# EAGLE board RGB_Taster_WS2811 4 mal (EAGLE 9.6.2)
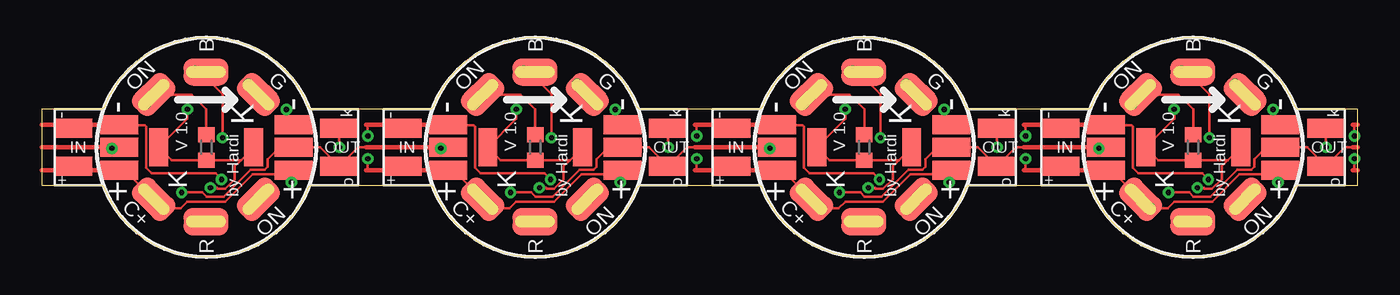
[diagram p0: board, top side]
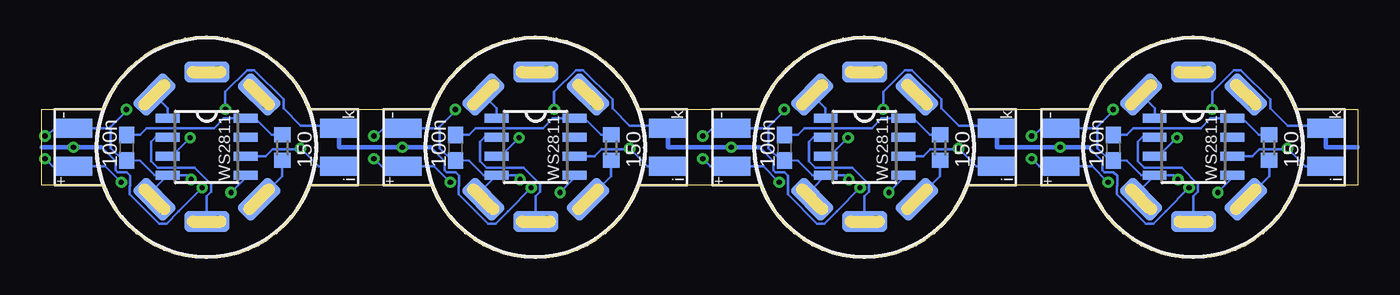
[diagram p1: board, bottom side, seen from below]

Size 88 x 14.7 mm. Coordinates in mm from the lower left corner, seen from the top.
Outline: 17.98,4.81 18.11,4.81
Outline: 18.11,4.81 22,4.81 25.89,4.81 arc-70 26.23,4.56 arc70 32.98,0 arc70 39.77,4.56 arc-70 40.11,4.81
Outline: 18.11,4.81 arc70 17.77,4.56 arc-70 10.98,0 arc-70 4.23,4.56 arc70 3.89,4.81 0,4.81 0,9.89 3.89,9.89 arc75 4.23,10.14 arc-70 10.98,14.7 arc-70 17.77,10.14 arc70 18.11,9.89 22,9.89 25.89,9.89 arc75 26.23,10.14 arc-70 32.98,14.7 arc-70 39.77,10.14 arc70 40.11,9.89 44,9.89 47.89,9.89 arc75 48.23,10.14 arc-70 54.98,14.7 arc-70 61.77,10.14 arc70 62.11,9.89 66,9.89 69.89,9.89 arc75 70.23,10.14 arc-70 76.98,14.7 arc-70 83.77,10.14 arc70 84.11,9.89 88,9.89 88,4.81 84.11,4.81
Outline: 39.98,4.81 40.11,4.81
Outline: 40.11,4.81 44,4.81 47.89,4.81 arc-70 48.23,4.56 arc70 54.98,0 arc70 61.77,4.56 arc-70 62.11,4.81
Outline: 61.98,4.81 62.11,4.81
Outline: 62.11,4.81 66,4.81 69.89,4.81 arc-70 70.23,4.56 arc70 76.98,0 arc70 83.77,4.56 arc-70 84.11,4.81
Outline: 83.98,4.81 84.11,4.81
Copper layers (1*16): Top 0.035mm / dielectric 1.5mm / Bottom 0.035mm
Design rules "default *": minimum track width 6mil, minimum drill 0.35mm, track to track 6mil, track to pad 6mil, pad to pad 6mil, via to via 6mil, smd to smd 6mil, copper to edge 40mil, drill to drill 6mil, minimum pad ring 10mil, minimum via ring 8mil, stop-mask expansion 4mil, vias tented up to drill 0.5mm, thermal gap 10mil

## Footprints (pad centres in the part's own frame; a part is rotated, then mirrored left to right if it is on the bottom)
LANG_LOCH2 = smd 3 x 1.8: P$1 0,0 | smd 3 x 1.4 bottom: P$2 0,0
C0603 = smd 1.1 x 1: 1 -0.85,0; 2 0.85,0
SMD1,27-2,54 = smd 1.27 x 2.54: 1 0,0
RCL_R0603 = smd 1 x 1.1: 1 -0.85,0; 2 0.85,0
SOP8 = smd 0.6 x 1.6: 1 -1.905,-2.6; 2 -0.635,-2.6; 3 0.635,-2.6; 4 1.905,-2.6; 5 1.905,2.6; 6 0.635,2.6; 7 -0.635,2.6; 8 -1.905,2.6

## Placement (x,y rotation side)
B  LANG_LOCH2  [LANG_LOCH2]  10.98,12.37 180 top
B1  LANG_LOCH2  [LANG_LOCH2]  32.98,12.37 180 top
B2  LANG_LOCH2  [LANG_LOCH2]  54.98,12.37 180 top
B3  LANG_LOCH2  [LANG_LOCH2]  76.98,12.37 180 top
C1  100n  [C0603]  16.33,7.33 270 bottom
C2  100n  [C0603]  38.33,7.33 270 bottom
C3  100n  [C0603]  60.33,7.33 270 bottom
C4  100n  [C0603]  82.33,7.33 270 bottom
C+  LANG_LOCH2  [LANG_LOCH2]  7.48,3.87 135 top
C+1  LANG_LOCH2  [LANG_LOCH2]  29.48,3.87 135 top
C+2  LANG_LOCH2  [LANG_LOCH2]  51.48,3.87 135 top
C+3  LANG_LOCH2  [LANG_LOCH2]  73.48,3.87 135 top
G  LANG_LOCH2  [LANG_LOCH2]  14.48,10.87 135 top
G1  LANG_LOCH2  [LANG_LOCH2]  36.48,10.87 135 top
G2  LANG_LOCH2  [LANG_LOCH2]  58.48,10.87 135 top
G3  LANG_LOCH2  [LANG_LOCH2]  80.48,10.87 135 top
ON1  LANG_LOCH2  [LANG_LOCH2]  7.48,10.87 45 top
ON2  LANG_LOCH2  [LANG_LOCH2]  14.48,3.87 45 top
ON3  LANG_LOCH2  [LANG_LOCH2]  29.48,10.87 45 top
ON4  LANG_LOCH2  [LANG_LOCH2]  36.48,3.87 45 top
ON5  LANG_LOCH2  [LANG_LOCH2]  51.48,10.87 45 top
ON6  LANG_LOCH2  [LANG_LOCH2]  58.48,3.87 45 top
ON7  LANG_LOCH2  [LANG_LOCH2]  73.48,10.87 45 top
ON8  LANG_LOCH2  [LANG_LOCH2]  80.48,3.87 45 top
PI1  [SMD1,27-2,54]  5.16,5.83 90 top
PI2  [SMD1,27-2,54]  5.16,7.35 90 top
PI3  [SMD1,27-2,54]  5.16,8.87 90 top
PI4  [SMD1,27-2,54]  14.18,7.35 180 top
PI5  [SMD1,27-2,54]  27.16,7.35 90 top
PI6  [SMD1,27-2,54]  27.16,5.83 90 top
PI7  [SMD1,27-2,54]  27.16,8.87 90 top
PI8  [SMD1,27-2,54]  36.17,7.35 180 top
PI9  [SMD1,27-2,54]  49.16,7.35 90 top
PI10  [SMD1,27-2,54]  49.16,5.83 90 top
PI11  [SMD1,27-2,54]  49.16,8.87 90 top
PI12  [SMD1,27-2,54]  58.17,7.35 180 top
PI13  [SMD1,27-2,54]  71.16,7.35 90 top
PI14  [SMD1,27-2,54]  71.16,5.83 90 top
PI15  [SMD1,27-2,54]  71.16,8.87 90 top
PI16  [SMD1,27-2,54]  80.17,7.35 180 top
PO1  [SMD1,27-2,54]  16.84,5.83 90 top
PO2  [SMD1,27-2,54]  16.84,7.35 90 top
PO3  [SMD1,27-2,54]  16.84,8.87 90 top
PO4  [SMD1,27-2,54]  7.83,7.35 180 top
PO5  [SMD1,27-2,54]  38.84,7.35 90 top
PO6  [SMD1,27-2,54]  38.84,5.83 90 top
PO7  [SMD1,27-2,54]  38.84,8.87 90 top
PO8  [SMD1,27-2,54]  29.82,7.35 180 top
PO9  [SMD1,27-2,54]  60.84,7.35 90 top
PO10  [SMD1,27-2,54]  60.84,5.83 90 top
PO11  [SMD1,27-2,54]  60.84,8.87 90 top
PO12  [SMD1,27-2,54]  51.82,7.35 180 top
PO13  [SMD1,27-2,54]  82.84,7.35 90 top
PO14  [SMD1,27-2,54]  82.84,5.83 90 top
PO15  [SMD1,27-2,54]  82.84,8.87 90 top
PO16  [SMD1,27-2,54]  73.83,7.35 180 top
R  LANG_LOCH2  [LANG_LOCH2]  10.98,2.37 180 top
R1  150  [RCL_R0603]  5.92,7.33 90 bottom
R2  ?  [RCL_R0603]  11,7.35 90 top
R3  LANG_LOCH2  [LANG_LOCH2]  32.98,2.37 180 top
R4  150  [RCL_R0603]  27.92,7.33 90 bottom
R5  ?  [RCL_R0603]  33,7.35 90 top
R6  LANG_LOCH2  [LANG_LOCH2]  54.98,2.37 180 top
R7  150  [RCL_R0603]  49.92,7.33 90 bottom
R8  ?  [RCL_R0603]  55,7.35 90 top
R9  LANG_LOCH2  [LANG_LOCH2]  76.98,2.37 180 top
R10  150  [RCL_R0603]  71.92,7.33 90 bottom
R11  ?  [RCL_R0603]  77,7.35 90 top
SI1  [SMD1,27-2,54]  2.11,6.08 90 top
SI2  [SMD1,27-2,54]  2.11,6.08 270 bottom
SI3  [SMD1,27-2,54]  2.11,8.62 90 top
SI4  [SMD1,27-2,54]  2.11,8.62 270 bottom
SI5  [SMD1,27-2,54]  24.11,6.08 90 top
SI6  [SMD1,27-2,54]  24.11,6.08 270 bottom
SI7  [SMD1,27-2,54]  24.11,8.62 90 top
SI8  [SMD1,27-2,54]  24.11,8.62 270 bottom
SI9  [SMD1,27-2,54]  46.11,6.08 90 top
SI10  [SMD1,27-2,54]  46.11,6.08 270 bottom
SI11  [SMD1,27-2,54]  46.11,8.62 90 top
SI12  [SMD1,27-2,54]  46.11,8.62 270 bottom
SI13  [SMD1,27-2,54]  68.11,6.08 90 top
SI14  [SMD1,27-2,54]  68.11,6.08 270 bottom
SI15  [SMD1,27-2,54]  68.11,8.62 90 top
SI16  [SMD1,27-2,54]  68.11,8.62 270 bottom
SO1  [SMD1,27-2,54]  19.89,6.08 270 bottom
SO2  [SMD1,27-2,54]  19.89,6.08 90 top
SO3  [SMD1,27-2,54]  19.89,8.62 270 bottom
SO4  [SMD1,27-2,54]  19.89,8.62 90 top
SO5  [SMD1,27-2,54]  41.89,6.08 90 top
SO6  [SMD1,27-2,54]  41.89,6.08 270 bottom
SO7  [SMD1,27-2,54]  41.89,8.62 270 bottom
SO8  [SMD1,27-2,54]  41.89,8.62 90 top
SO9  [SMD1,27-2,54]  63.89,6.08 90 top
SO10  [SMD1,27-2,54]  63.89,6.08 270 bottom
SO11  [SMD1,27-2,54]  63.89,8.62 270 bottom
SO12  [SMD1,27-2,54]  63.89,8.62 90 top
SO13  [SMD1,27-2,54]  85.89,6.08 90 top
SO14  [SMD1,27-2,54]  85.89,6.08 270 bottom
SO15  [SMD1,27-2,54]  85.89,8.62 270 bottom
SO16  [SMD1,27-2,54]  85.89,8.62 90 top
U1  WS2811  [SOP8]  32.98,7.37 270 bottom
U2  WS2811  [SOP8]  54.98,7.37 270 bottom
U3  WS2811  [SOP8]  10.98,7.37 270 bottom
U4  WS2811  [SOP8]  76.98,7.37 270 bottom

## Library data of the parts
B B1-B3 C+ C+1-C+3 G G1-G3 ON1-ON8 R R3 R6 R9 = RGB_Tast
C1-C4 = rcl; SPICEPREFIX: C
PI1-PI16 PO1-PO16 SI1-SI16 SO1-SO16 = wirepad
R1 R2 R4 R5 R7 R8 R10 R11 = Sound_MP3-TF-16P_and_WS2811; SPICEPREFIX: R
U1-U4 = S3PO_Modul_WS2811

## Nets
+5V: C+1.P$1 C+1.P$2 C+2.P$1 C+2.P$2 C+3.P$1 C+3.P$2 C+.P$1 C+.P$2 PI1.1 PI6.1 PI10.1 PI14.1 PO1.1 PO6.1 PO10.1 PO14.1 R1.1 R4.1 R7.1 R10.1 SI1.1 SI5.1 SI9.1 SI13.1 SO1.1 SO6.1 SO10.1 SO14.1
BUT: PI4.1 PI8.1 PI12.1 PI16.1 PO4.1 PO8.1 PO12.1 PO16.1 R2.1 R5.1 R8.1 R11.1 SI4.1 SI8.1 SI12.1 SI16.1 SO4.1 SO8.1 SO12.1 SO16.1
DIN: PI2.1 SI2.1 U3.6
DIN1: PI5.1 PO2.1 SI6.1 SO2.1 U1.6 U3.5
DIN2: PI9.1 PO5.1 SI10.1 SO5.1 U1.5 U2.6
DIN3: PI13.1 PO9.1 SI14.1 SO9.1 U2.5 U4.6
DOUT3: PO13.1 SO13.1 U4.5
GND: C1.2 C2.2 C3.2 C4.2 ON2.P$1 ON2.P$2 ON4.P$1 ON4.P$2 ON6.P$1 ON6.P$2 ON8.P$1 ON8.P$2 PI3.1 PI7.1 PI11.1 PI15.1 PO3.1 PO7.1 PO11.1 PO15.1 SI3.1 SI7.1 SI11.1 SI15.1 SO3.1 SO7.1 SO11.1 SO15.1 U1.4 U2.4 U3.4 U4.4
N$1: C2.1 R4.2 U1.8
N$2: B.P$1 B.P$2 U3.3
N$3: R.P$1 R.P$2 U3.2
N$4: C1.1 R1.2 U3.8
N$5: G.P$1 G.P$2 U3.1
N$6: ON1.P$1 ON1.P$2 R2.2
N$7: B1.P$1 B1.P$2 U1.3
N$8: R3.P$1 R3.P$2 U1.2
N$9: G1.P$1 G1.P$2 U1.1
N$10: ON3.P$1 ON3.P$2 R5.2
N$11: C3.1 R7.2 U2.8
N$12: B2.P$1 B2.P$2 U2.3
N$13: R6.P$1 R6.P$2 U2.2
N$14: G2.P$1 G2.P$2 U2.1
N$15: ON5.P$1 ON5.P$2 R8.2
N$16: C4.1 R10.2 U4.8
N$17: B3.P$1 B3.P$2 U4.3
N$18: R9.P$1 R9.P$2 U4.2
N$19: G3.P$1 G3.P$2 U4.1
N$20: ON7.P$1 ON7.P$2 R11.2

## Tracks (layer width: path | path; a pad name or v marks a point on that pad's centre or on a via)
+5V  (via drill 0.35)
  Top 0.152: C+.P$2 v8.06,3.29 v8.08,3.29 9.29,3.29 9.73,3.72 12.27,3.72 14.09,5.55 16.56,5.55 PO1.1 16.36,5.34 v16.69,5.02 | C+.P$2 5.52,5.83 PI1.1 | 7.78,3.57 C+.P$2 | 2.11,5.9 SI1.1 2.84,5.83 | 21.79,5.83 v21.79,6.59 | C+1.P$2 v30.06,3.29 v30.08,3.29 31.29,3.29 31.73,3.72 34.27,3.72 36.09,5.55 38.56,5.55 PO6.1 38.36,5.34 v38.69,5.02 | C+1.P$2 27.52,5.83 PI6.1 | 29.78,3.57 C+1.P$2 | 24.11,5.9 SI5.1 24.84,5.83 | 43.8,5.83 v43.8,6.59 | C+2.P$2 v52.06,3.29 v52.08,3.29 53.29,3.29 53.73,3.72 56.27,3.72 58.09,5.55 60.56,5.55 PO10.1 60.36,5.34 v60.69,5.02 | C+2.P$2 49.52,5.83 PI10.1 | 51.78,3.57 C+2.P$2 | 46.11,5.9 SI9.1 46.84,5.83 | 65.8,5.83 v65.8,6.59 | C+3.P$2 74.06,3.29 v74.08,3.29 75.29,3.29 75.73,3.72 78.27,3.72 80.09,5.55 82.56,5.55 PO14.1 82.36,5.34 v82.69,5.02 | C+3.P$2 71.52,5.83 PI14.1 | 73.78,3.57 C+3.P$2 | 68.11,5.9 SI13.1 68.84,5.83 | 87.8,5.83 v87.8,6.59
  Top 0.305: PI1.1 2.84,5.83 0.2,5.83 0,5.83 | 21.67,5.83 21.79,5.83 22,5.83 24.84,5.83 PI6.1 | 43.67,5.83 43.8,5.83 44,5.83 46.84,5.83 PI10.1 | 65.67,5.83 65.8,5.83 66,5.83 68.84,5.83 PI14.1 | 88,5.83 87.8,5.83 87.67,5.83
  Bottom 0.152: R1.1 5.92,5.43 C+.P$2 v8.06,3.29 v8.08,3.29 | v16.69,5.02 17.75,6.08 SO1.1 21.29,6.08 v21.79,6.59 | R4.1 27.92,5.43 C+1.P$2 v30.06,3.29 v30.08,3.29 | v38.69,5.02 39.75,6.08 SO6.1 43.29,6.08 v43.8,6.59 | R7.1 49.92,5.43 C+2.P$2 v52.06,3.29 v52.08,3.29 | v60.69,5.02 61.75,6.08 SO10.1 65.29,6.08 v65.8,6.59 | R10.1 71.92,5.43 C+3.P$2 74.06,3.29 v74.08,3.29 | v82.69,5.02 83.75,6.08 SO14.1 87.29,6.08 v87.8,6.59
BUT  (via drill 0.35)
  Top 0.152: 13.32,6.5 R2.1 8.68,6.5 PO4.1 9.73,9.26 v9.73,9.89 | 13.32,6.5 12.9,6.08 12.9,5.22 12.27,4.58 11.77,4.58 11.7,4.64 v11.28,4.64 | 13.32,6.5 PI4.1 | v19.89,7.35 SO4.1 | 35.32,6.5 R5.1 30.67,6.5 PO8.1 31.73,9.26 v31.73,9.89 | 35.32,6.5 34.91,6.08 34.91,5.22 34.27,4.58 33.77,4.58 33.7,4.64 v33.28,4.64 | 35.32,6.5 PI8.1 | v41.89,7.35 SO8.1 | 79.33,6.5 R11.1 74.67,6.5 PO16.1 75.73,9.26 v75.73,9.89 | 79.33,6.5 78.91,6.08 78.91,5.22 78.27,4.58 77.77,4.58 77.7,4.64 v77.28,4.64 | 79.33,6.5 PI16.1 | v85.89,7.35 SO16.1 | 57.32,6.5 R8.1 52.67,6.5 PO12.1 53.73,9.26 v53.73,9.89 | 57.32,6.5 56.91,6.08 56.91,5.22 56.27,4.58 55.77,4.58 55.7,4.64 v55.28,4.64 | 57.32,6.5 PI12.1 | v63.89,7.35 SO12.1
  Bottom 0.152: 17.98,7.35 17.06,6.43 17.06,5.83 16.93,5.7 16.33,5.7 16.08,5.45 16.08,4.77 16.12,4.73 16.12,4.2 14.15,2.23 13.67,2.23 12.84,3.07 12.84,3.08 v11.28,4.64 | SI4.1 2.29,8.8 4.68,8.8 5.84,9.95 5.84,10.55 7.8,12.51 8.28,12.51 9.73,11.07 v9.73,9.89 | 39.98,7.35 39.06,6.43 39.06,5.83 38.93,5.7 38.33,5.7 38.08,5.45 38.08,4.77 38.12,4.73 38.12,4.2 36.15,2.23 35.67,2.23 34.84,3.07 34.84,3.08 v33.28,4.64 | SI8.1 24.29,8.8 26.68,8.8 27.84,9.95 27.84,10.55 29.8,12.51 30.28,12.51 31.73,11.07 v31.73,9.89 | 83.98,7.35 83.06,6.43 83.06,5.83 82.93,5.7 82.33,5.7 82.08,5.45 82.08,4.77 82.12,4.73 82.12,4.2 80.15,2.23 79.67,2.23 78.84,3.07 78.84,3.08 v77.28,4.64 | SI16.1 68.29,8.8 70.68,8.8 71.84,9.95 71.84,10.55 73.8,12.51 74.28,12.51 75.73,11.07 v75.73,9.89 | 61.98,7.35 61.06,6.43 61.06,5.83 60.93,5.7 60.33,5.7 60.08,5.45 60.08,4.77 60.12,4.73 60.12,4.2 58.15,2.23 57.67,2.23 56.84,3.07 56.84,3.08 v55.28,4.64 | SI12.1 46.29,8.8 48.68,8.8 49.84,9.95 49.84,10.55 51.8,12.51 52.28,12.51 53.73,11.07 v53.73,9.89
  Bottom 0.305: 17.98,7.35 v19.89,7.35 22,7.35 24.11,7.35 SI8.1 | 0,7.35 2.11,7.35 SI4.1 | 39.98,7.35 v41.89,7.35 44,7.35 46.11,7.35 SI12.1 | 83.98,7.35 v85.89,7.35 88,7.35 | SI16.1 68.11,7.35 66,7.35 v63.89,7.35 61.98,7.35
DIN  (via drill 0.35)
  Top 0.152: PI2.1 5.09,7.28 v4.69,7.28
  Top 0.305: PI2.1 0.2,7.35 0,7.35
  Bottom 0.152: U3.6 7.03,6.74 6.57,7.2 4.77,7.2 v4.69,7.28 3.49,6.08 SI2.1
DIN1  (via drill 0.35)
  Top 0.152: PI5.1 27.09,7.28 v26.69,7.28 | v9.35,4.33 10.73,4.33 11.03,4.04 12.15,4.04 13.97,5.85 14.9,5.85 15.09,6.04 15.09,6.56 15.88,7.35 PO2.1 18.62,7.35 SO2.1 21.16,7.35 21.67,7.35
  Top 0.305: PI5.1 22,7.35 21.67,7.35
  Bottom 0.152: U1.6 29.03,6.74 28.56,7.2 26.77,7.2 v26.69,7.28 25.49,6.08 SI6.1 | v9.35,4.33 8.38,5.3 U3.5
DIN2  (via drill 0.35)
  Top 0.152: PI9.1 49.09,7.28 v48.69,7.28 | v31.35,4.33 32.73,4.33 33.02,4.04 34.15,4.04 35.97,5.85 36.91,5.85 37.09,6.04 37.09,6.56 37.88,7.35 PO5.1 40.62,7.35 SO5.1 43.16,7.35 43.67,7.35
  Top 0.305: PI9.1 44,7.35 43.67,7.35
  Bottom 0.152: U2.6 51.03,6.74 50.56,7.2 48.77,7.2 v48.69,7.28 47.49,6.08 SI10.1 | v31.35,4.33 30.38,5.3 U1.5
DIN3  (via drill 0.35)
  Top 0.152: PI13.1 71.09,7.28 v70.69,7.28 | v53.35,4.33 54.73,4.33 55.02,4.04 56.15,4.04 57.97,5.85 58.91,5.85 59.09,6.04 59.09,6.56 59.88,7.35 PO9.1 62.62,7.35 SO9.1 65.16,7.35 65.67,7.35
  Top 0.305: PI13.1 66,7.35 65.67,7.35
  Bottom 0.152: U4.6 73.03,6.74 72.56,7.2 70.77,7.2 v70.69,7.28 69.49,6.08 SI14.1 | v53.35,4.33 52.38,5.3 U2.5
DOUT3  (via drill 0.35)
  Top 0.152: v75.35,4.33 76.73,4.33 77.02,4.04 78.15,4.04 79.97,5.85 80.91,5.85 81.09,6.04 81.09,6.56 81.88,7.35 PO13.1 84.62,7.35 SO13.1 87.16,7.35 87.67,7.35
  Top 0.305: 88,7.35 87.67,7.35
  Bottom 0.152: v75.35,4.33 74.38,5.3 U4.5
GND  (via drill 0.35)
  Top 0.152: v13.92,3.29 13.92,3.38 ON2.P$2 | v12.02,5.19 11.61,5.6 7.35,5.6 6.96,5.98 6.96,8.72 6.87,8.81 5.22,8.81 PI3.1 5.16,9.28 5.32,9.44 | PO3.1 16.35,9.36 v16.35,9.88 | 2.11,8.8 SI3.1 2.53,8.87 | 21.79,8.87 v21.79,8.11 | v35.92,3.29 35.92,3.38 ON4.P$2 | v34.02,5.19 33.61,5.6 29.35,5.6 28.96,5.98 28.96,8.72 28.87,8.81 27.22,8.81 PI7.1 27.16,9.28 27.32,9.44 | PO7.1 38.35,9.36 v38.35,9.88 | 24.11,8.8 SI7.1 24.53,8.87 | 43.8,8.87 v43.8,8.11 | v57.92,3.29 57.92,3.38 ON6.P$2 | v56.02,5.19 55.61,5.6 51.35,5.6 50.96,5.98 50.96,8.72 50.87,8.81 49.22,8.81 PI11.1 49.16,9.28 49.32,9.44 | PO11.1 60.35,9.36 v60.35,9.88 | 46.11,8.8 SI11.1 46.53,8.87 | 65.8,8.87 v65.8,8.11 | v79.92,3.29 79.92,3.38 ON8.P$2 | v78.02,5.19 77.61,5.6 73.35,5.6 72.96,5.98 72.96,8.72 72.87,8.81 71.22,8.81 PI15.1 71.16,9.28 71.32,9.44 | PO15.1 82.35,9.36 v82.35,9.88 | 68.11,8.8 SI15.1 68.53,8.87 | 87.8,8.87 v87.8,8.11
  Top 0.305: PI3.1 2.53,8.87 0.2,8.87 0,8.87 | 21.67,8.87 21.79,8.87 22,8.87 24.53,8.87 PI7.1 | 43.67,8.87 43.8,8.87 44,8.87 46.53,8.87 PI11.1 | 65.67,8.87 65.8,8.87 66,8.87 68.53,8.87 PI15.1 | 87.67,8.87 87.8,8.87 88,8.87
  Bottom 0.152: U3.4 14.45,5.47 15.44,6.45 C1.2 16.57,6.48 17.4,7.3 17.4,8.62 | U3.4 14.48,4.57 ON2.P$2 13.89,3.29 v13.92,3.29 | U3.4 12.29,5.47 v12.02,5.19 | v16.35,9.88 16.35,9.76 17.4,8.72 17.4,8.62 | v21.79,8.11 21.67,8.11 21.16,8.62 SO3.1 17.4,8.62 | U1.4 36.45,5.47 37.43,6.45 C2.2 38.57,6.48 39.4,7.3 39.4,8.62 | U1.4 36.48,4.57 ON4.P$2 35.89,3.29 v35.92,3.29 | U1.4 34.29,5.47 v34.02,5.19 | v38.35,9.88 38.35,9.76 39.4,8.72 39.4,8.62 | v43.8,8.11 43.67,8.11 43.16,8.62 SO7.1 39.4,8.62 | U2.4 58.45,5.47 59.43,6.45 C3.2 60.57,6.48 61.4,7.3 61.4,8.62 | U2.4 58.48,4.57 ON6.P$2 57.89,3.29 v57.92,3.29 | U2.4 56.29,5.47 v56.02,5.19 | v60.35,9.88 60.35,9.76 61.4,8.72 61.4,8.62 | v65.8,8.11 65.67,8.11 65.16,8.62 SO11.1 61.4,8.62 | U4.4 80.45,5.47 81.44,6.45 C4.2 82.57,6.48 83.4,7.3 83.4,8.62 | U4.4 80.48,4.57 ON8.P$2 79.89,3.29 v79.92,3.29 | U4.4 78.29,5.47 v78.02,5.19 | v82.35,9.88 82.35,9.76 83.4,8.72 83.4,8.62 | v87.8,8.11 87.67,8.11 87.16,8.62 SO15.1 83.4,8.62
N$1
  Bottom 0.152: R4.2 28.62,8.18 29.72,9.28 U1.8 31.83,9.28 32.49,8.62 37.01,8.62 37.44,8.19 C2.1
N$2  (via drill 0.35)
  Top 0.152: v10.24,12.43 10.29,12.37 B.P$2 10.98,12.02 12.08,10.91 v12.08,7.99
  Bottom 0.152: B.P$2 10.29,12.37 v10.24,12.43 | U3.3 13.33,6.74 v12.08,7.99
N$3  (via drill 0.35)
  Top 0.152: v10.24,2.4 10.95,2.4 R.P$2
  Bottom 0.152: v10.24,2.4 10.26,2.37 R.P$2 10.98,4.09 10.67,4.39 10.67,4.9 11.77,6 14.26,6 14.68,6.42 14.68,7.73 14.4,8.01 U3.2
N$4
  Bottom 0.152: R1.2 6.62,8.18 7.72,9.28 U3.8 9.83,9.28 10.49,8.62 15.01,8.62 15.44,8.19 C1.1
N$5  (via drill 0.35)
  Top 0.152: v13.79,11.54 13.81,11.54 G.P$2
  Bottom 0.152: U3.1 13.58,9.97 G.P$2 13.81,11.54 v13.79,11.54
N$6  (via drill 0.35)
  Top 0.152: v6.94,10.27 7.48,10.81 ON1.P$2 10.02,10.87 11,9.89 R2.2
  Bottom 0.152: ON1.P$2 6.94,10.33 v6.94,10.27
N$7  (via drill 0.35)
  Top 0.152: v32.24,12.43 32.29,12.37 B1.P$2 32.98,12.02 34.08,10.91 v34.08,7.99
  Bottom 0.152: B1.P$2 32.29,12.37 v32.24,12.43 | U1.3 35.33,6.74 v34.08,7.99
N$8  (via drill 0.35)
  Top 0.152: v32.24,2.4 32.95,2.4 R3.P$2
  Bottom 0.152: v32.24,2.4 32.26,2.37 R3.P$2 32.98,4.09 32.67,4.39 32.67,4.9 33.77,6 36.26,6 36.68,6.42 36.68,7.73 36.41,8.01 U1.2
N$9  (via drill 0.35)
  Top 0.152: v35.79,11.54 35.81,11.54 G1.P$2
  Bottom 0.152: U1.1 35.58,9.97 G1.P$2 35.81,11.54 v35.79,11.54
N$10  (via drill 0.35)
  Top 0.152: v28.94,10.27 29.48,10.81 ON3.P$2 32.02,10.87 33,9.89 R5.2
  Bottom 0.152: ON3.P$2 28.94,10.33 v28.94,10.27
N$11
  Bottom 0.152: R7.2 50.62,8.18 51.72,9.28 U2.8 53.83,9.28 54.49,8.62 59.01,8.62 59.44,8.19 C3.1
N$12  (via drill 0.35)
  Top 0.152: v54.24,12.43 54.29,12.37 B2.P$2 54.98,12.02 56.08,10.91 v56.08,7.99
  Bottom 0.152: B2.P$2 54.29,12.37 v54.24,12.43 | U2.3 57.33,6.74 v56.08,7.99
N$13  (via drill 0.35)
  Top 0.152: v54.24,2.4 54.95,2.4 R6.P$2
  Bottom 0.152: v54.24,2.4 54.26,2.37 R6.P$2 54.98,4.09 54.67,4.39 54.67,4.9 55.77,6 58.26,6 58.68,6.42 58.68,7.73 58.41,8.01 U2.2
N$14  (via drill 0.35)
  Top 0.152: v57.79,11.54 57.81,11.54 G2.P$2
  Bottom 0.152: U2.1 57.58,9.97 G2.P$2 57.81,11.54 v57.79,11.54
N$15  (via drill 0.35)
  Top 0.152: v50.94,10.27 51.48,10.81 ON5.P$2 54.02,10.87 55,9.89 R8.2
  Bottom 0.152: ON5.P$2 50.94,10.33 v50.94,10.27
N$16
  Bottom 0.152: R10.2 72.62,8.18 73.72,9.28 U4.8 75.83,9.28 76.49,8.62 81.01,8.62 81.44,8.19 C4.1
N$17  (via drill 0.35)
  Top 0.152: v76.24,12.43 76.29,12.37 B3.P$2 76.98,12.02 78.08,10.91 v78.08,7.99
  Bottom 0.152: B3.P$2 76.29,12.37 v76.24,12.43 | U4.3 79.33,6.74 v78.08,7.99
N$18  (via drill 0.35)
  Top 0.152: v76.24,2.4 76.95,2.4 R9.P$2
  Bottom 0.152: v76.24,2.4 76.26,2.37 R9.P$2 76.98,4.09 76.67,4.39 76.67,4.9 77.77,6 80.26,6 80.68,6.42 80.68,7.73 80.41,8.01 U4.2
N$19  (via drill 0.35)
  Top 0.152: v79.79,11.54 79.81,11.54 G3.P$2
  Bottom 0.152: U4.1 79.58,9.97 G3.P$2 79.81,11.54 v79.79,11.54
N$20  (via drill 0.35)
  Top 0.152: v72.94,10.27 73.48,10.81 ON7.P$2 76.02,10.87 77,9.89 R11.2
  Bottom 0.152: ON7.P$2 72.94,10.33 v72.94,10.27

## Text on the board
tPlace: B | B | B | B | G | G | G | G | ON | ON | ON | ON | C+ | ON | C+ | ON | C+ | ON | C+ | ON | R | R | R | R
tNames: - | - | - | - | - | - | - | - | - | K | k | - | K | k | - | K | k | - | K | k | IN | V 1.0 | OUT | IN | V 1.0 | OUT | IN | V 1.0 | OUT | IN | V 1.0 | OUT | K | K | K | K | + | o | + | o | + | o | + | o | + | by Hardi | + | + | by Hardi | + | + | by Hardi | + | + | by Hardi | +
bNames: k | - | k | - | k | - | k | - | i | + | i | + | i | + | i | +